# Altium PCB PCB1.PcbDoc
Units mil, origin at the board's own origin, x right, y up, seen from the top; angles counter-clockwise.
Board outline 2435 x 2620 mil, 2 copper layers (Top Layer, Bottom Layer); 6 components, 9 nets, 46 pads, 0 vias.
Unrouted connection lines stored in the file: 2.
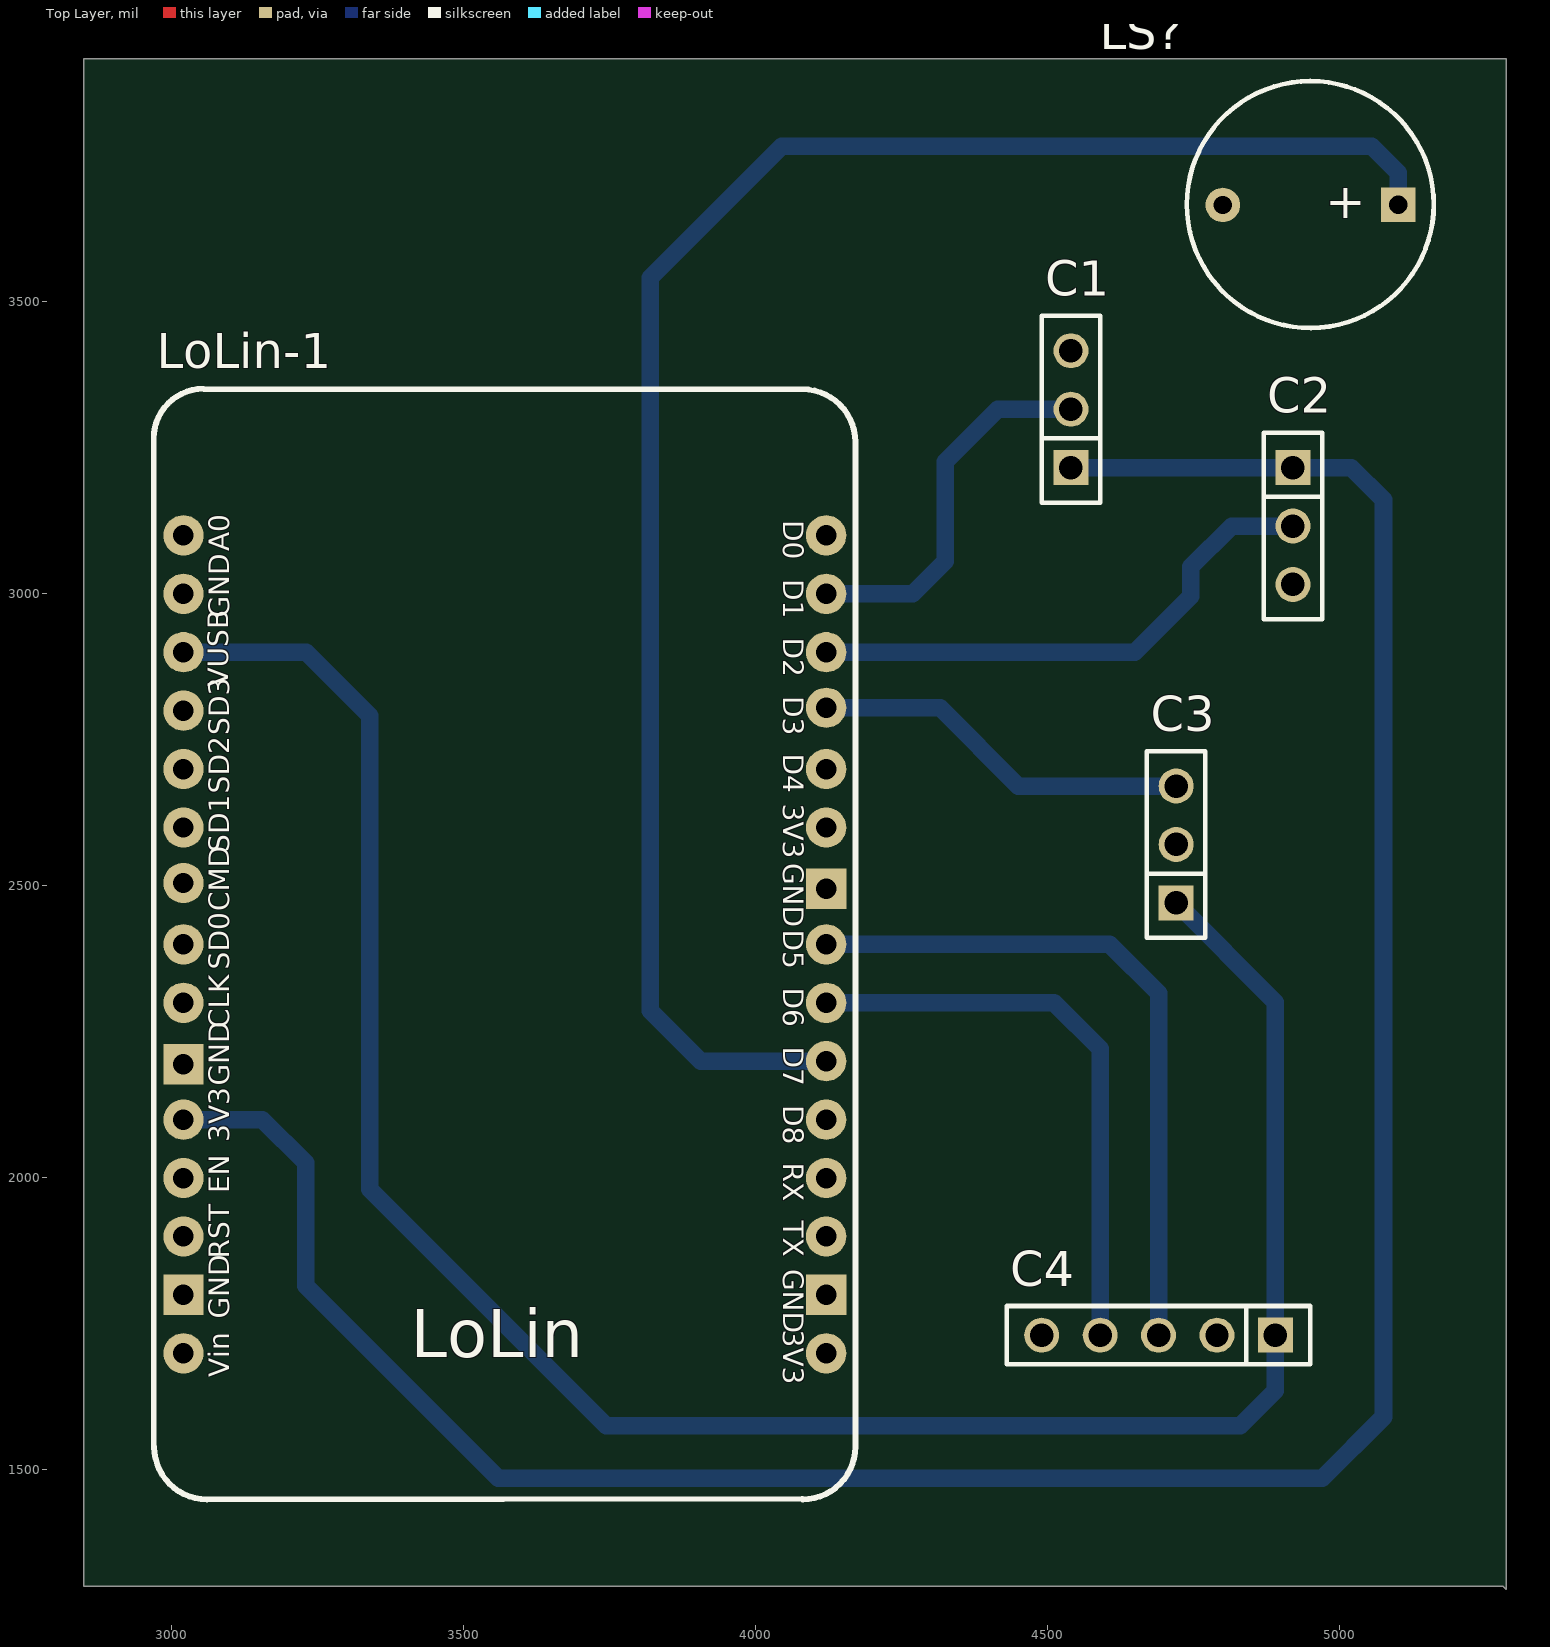
[diagram p0: Top Layer view]
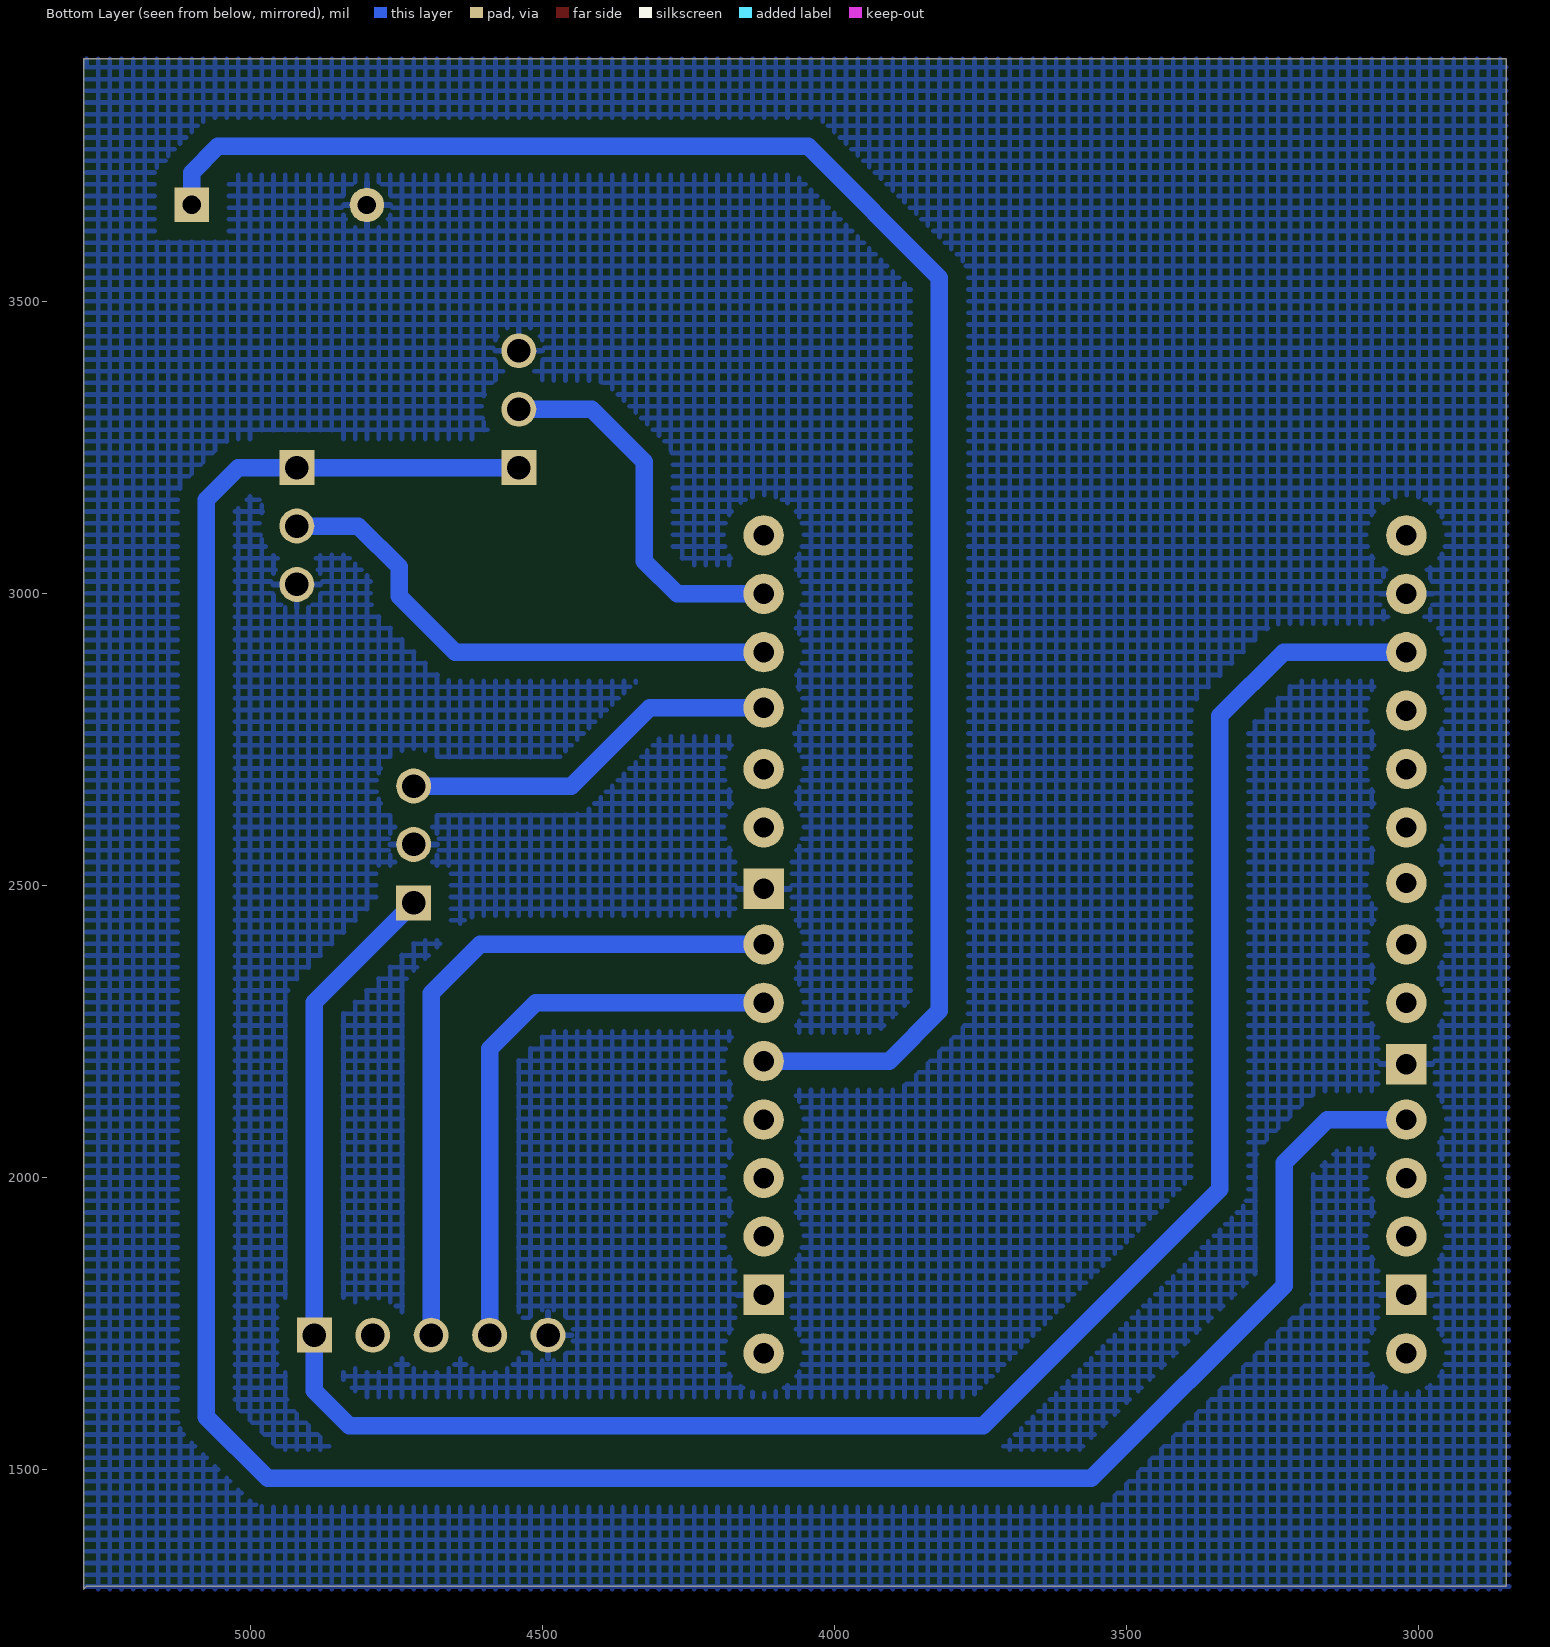
[diagram p1: Bottom Layer view, seen from below]
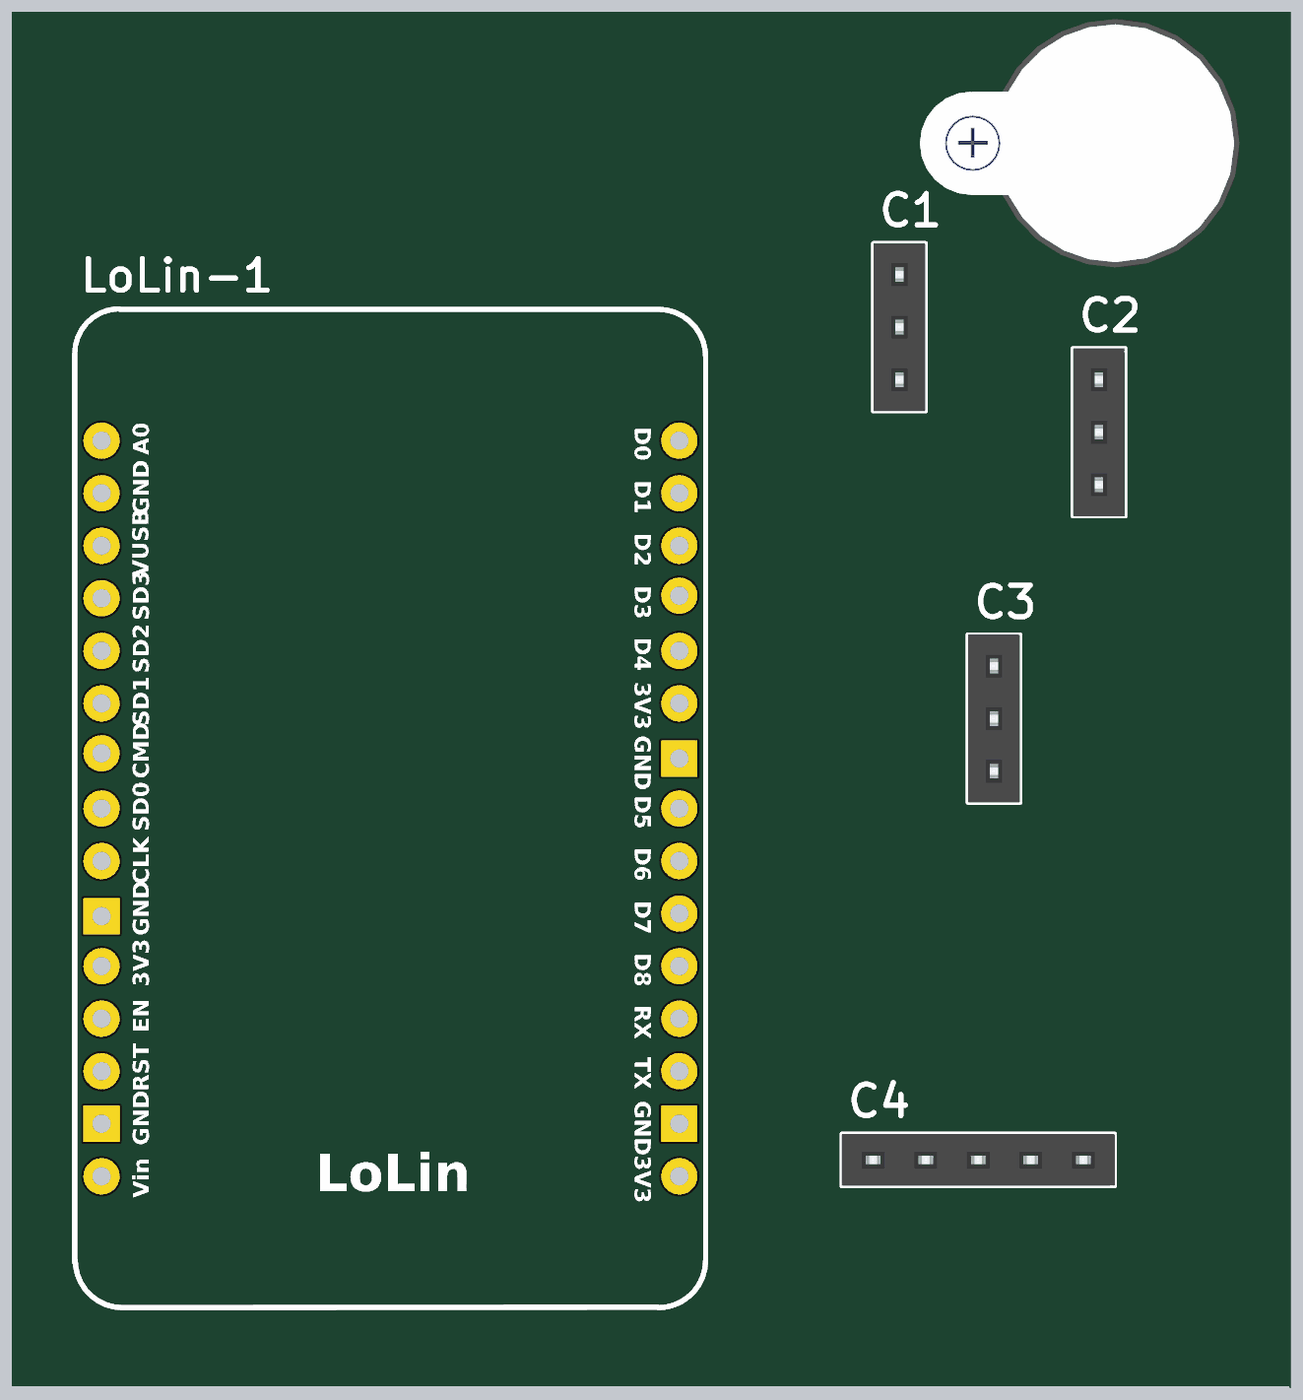
[diagram p2: 3D render of the assembled board from above, using the file's embedded part models]

## Layer stack, top to bottom
Top Solder: solder mask 0.4, Solder Resist, Dk 3.5
Top Layer: signal copper 1.4
Dielectric 1: dielectric 12.6, FR-4, Dk 4.8
Bottom Layer: signal copper 1.4
Bottom Solder: solder mask 0.4, Solder Resist, Dk 3.5

## Board outline
2850,1300 2850,3915 5285,3915 5285,1295 5280,1300

## Design rules (kind name [scope] priority, off if disabled: settings)
Clearance [All] p1: gap=30
PolygonConnect [All] p1: connectstyle=Relief reliefconductorwidth=10 reliefentries=4 polygonreliefangle="90 Angle" airgapwidth=10
RoutingVias [All] p1: holewidth=28 width=50 viastyle="Through Hole" minholewidth=28 minwidth=50 maxholewidth=28 maxwidth=50
SolderMaskExpansion [All] p1: expansion=4
Width [All] p1: maxlimit=30 minlimit=10 preferedwidth=20
30 further rules are at their usual default settings.

## Components (designator, comment, footprint, x,y, rotation, side; value= is the part's Value field where it differs from the comment)
C1 "JP3" JP3-C1T 4540,3215 r90 top
C2 "JP3" JP3-C1T 4920,3215 r270 top
C3 "JP3" JP3-C1T 4720,2470 r90 top
C4 "JP5" JP5-C1T 4890,1730 r180 top
LoLin-1 "NodeMCU V1.0 ESP-12E_1" "LoLin NodeMcu V3" 3070,3345 r0 top
LS? "Speaker" SPEAKER 5100,3665 r180 top

## Footprints (in the part's own frame and the unit in brackets; to place one, negate y for a bottom-side part, rotate by r counter-clockwise, add the part's x,y. Pads: shape width x height; smd on the part's side, far side on the other; paste and mask are expansions set on the pad)
JP3-C1T [mm] "3 row, straight, gold plating"
  rect 1.52x1.52 hole 1.02: 1(0,0)
  round 1.52 hole 1.02: 2(2.54,0) 3(5.08,0)
  silkscreen extent -1.52,-1.27 6.6,1.27, body extent -1.52,-1.25 6.6,1.25, height 8.51
JP5-C1T [mm] "5 row, straight, gold plating"
  rect 1.52x1.52 hole 1.02: 1(0,0)
  round 1.52 hole 1.02: 2(2.54,0) 3(5.08,0) 4(7.62,0) 5(10.16,0)
  silkscreen extent -1.52,-1.27 11.68,1.27, body extent -1.52,-1.25 11.68,1.25, height 8.51
"LoLin NodeMcu V3" [mil]
  round 69 hole 35: 3V3(-49,-1246) 3V3(1051,-1646) 3V3(1051,-746) A0(-49,-246) CLK(-49,-1046) CMD(-49,-841) D0(1051,-246) D1(1051,-346) D2(1051,-446) D3(1051,-541) D4(1051,-646) D5(1051,-946) D6(1051,-1046) D7(1051,-1146) D8(1051,-1246) EN(-49,-1346) GND(-49,-346) RST(-49,-1446) RX(1051,-1346) SD0(-49,-946) SD1(-49,-746) SD2(-49,-646) SD3(-49,-546) TX(1051,-1446) VIN(-49,-1646) VUSB(-49,-446)
  rect 69x69 hole 35: GND(-49,-1546) GND(-49,-1151) GND(1051,-1546) GND(1051,-851)
  silkscreen extent -100,-1896 1101,5
SPEAKER [mm]
  rect 1.5x1.5 hole 0.8: 1(0,0)
  round 1.5 hole 0.8: 2(7.62,0.013)
  silkscreen extent -1.55,-5.38 9.18,5.36, body extent -2.22,-6 13.24,6, height 4.5

## Part data
C1 C2 C3 C4: "WR-PHD 2.54 mm Angled Socket Header"
LoLin-1: "LoLin NodeMCU V3"
LS?: "Loudspeaker"

## Nets (pads, with @x,y where several pads share a name; then routed paths per layer and width w, separated by ;. In a path a pad name is that pad's centre, name@x,y a point inside that pad or via, vN(x,y) a via of type N, cw(c..) or ccw(c..) an arc to the next point about the centre after c; other vN are vias at no path point)
3.3V: C1.1 C2.1 LoLin-1.3V3 | length 4602.6
  Bottom Layer w30: LoLin-1.3V3@3021,2099 3156,2099 3230,2025 3230,1815 3560,1485 4970,1485 5075,1590 5075,3160 5020,3215 C2.1 C1.1
DHT1: C1.2 LoLin-1.D1 | length 649.5
  Bottom Layer w30: LoLin-1.D1 4269,2999 4325,3055 4325,3225 4415,3315 C1.2
DHT2: C2.2 LoLin-1.D2 | length 917.8
  Bottom Layer w30: LoLin-1.D2 4649,2899 4745,2995 4745,3045 4815,3115 C2.2
GND: C1.3 C2.3 C3.2 C4.5 LoLin-1.GND LS?.2
NetC4_3: C4.3 LoLin-1.D5 | length 1188.8
  Bottom Layer w30: LoLin-1.D5 4606,2399 4690,2315 C4.3
NetC4_4: C4.4 LoLin-1.D6 | length 991.7
  Bottom Layer w30: LoLin-1.D6 4511,2299 4590,2220 C4.4
NetLoLin-1_D7: LoLin-1.D7 LS?.1 | length 3038.5
  Bottom Layer w30: LoLin-1.D7 3906,2199 3820,2285 3820,3540 4045,3765 5055,3765 5100,3720 LS?.1
RELAY: C3.3 LoLin-1.D3 | length 654.5
  Bottom Layer w30: LoLin-1.D3 4316,2804 4450,2670 C3.3
VCC: C3.1 C4.1 LoLin-1.VUSB | length 3822.2
  Bottom Layer w30: LoLin-1.VUSB 3231,2899 3340,2790 3340,1980 3745,1575 4830,1575 4890,1635 C4.1 4890,2300 C3.1
pads on no net: C4.2 LoLin-1.A0 LoLin-1.CLK LoLin-1.CMD LoLin-1.D0 LoLin-1.D4 LoLin-1.D8 LoLin-1.EN LoLin-1.RST LoLin-1.RX LoLin-1.SD0 LoLin-1.SD1 LoLin-1.SD2 LoLin-1.SD3 LoLin-1.TX LoLin-1.VIN

## Polygon pours and split planes (outlines as drawn)
GND on Mechanical 1 "Bottom Layer-No Net" (hatched 90Degree grid 20 track 8, remove dead copper): 2850,3580 5280,3580 5280,1300 2850,1300
GND on Mechanical 1 "Bottom Layer-No Net" (hatched 90Degree grid 20 track 8, remove dead copper): 2850,3580 5290,3580 5300,3570 5280,3550 5280,1300 2860,1300
GND on Bottom Layer "Bottom Layer-No Net" (hatched 90Degree grid 20 track 8, remove dead copper, pour order 4): 2850,3915 5290,3915 5280,3905 5280,1295 2845,1295

## Silkscreen, mask and mechanical layers (free items; w line width, h text height)
Mechanical 1:
  lines w10: 2850,1300 2850,1350 2850,3915 5285,3915 5285,1295 5280,1300 2850,1300

## Text inside footprints (layer, text, board x,y; h text height)
LoLin-1: Top Overlay "LoLin" at 3410,1665 h140; Top Overlay "CLK" at 3111,2255 h60 r90; Top Overlay "SD0" at 3111,2355.43 h60 r90; Top Overlay "SD1" at 3111,2556.29 h60 r90; Top Overlay "SD2" at 3111,2656.71 h60 r90; Top Overlay "SD3" at 3111,2757.14 h60 r90; Top Overlay "VUSB" at 3110,2840 h60 r90; Top Overlay "GND" at 3111,2958 h60 r90; Top Overlay "A0" at 3111,3072 h60 r90; Top Overlay "D5" at 4036,2424 h60 r270; Top Overlay "GND" at 4036,2538 h60 r270; Top Overlay "3V3" at 4036,2639.99 h60 r270; Top Overlay "D4" at 4036,2725 h60 r270; Top Overlay "D3" at 4036,2823.42 h60 r270; Top Overlay "D2" at 4036,2923.42 h60 r270; Top Overlay "D1" at 4036,3023.65 h60 r270; Top Overlay "D0" at 4036,3125 h60 r270; Top Overlay "CMD" at 3111,2455.86 h60 r90; Top Overlay "D6" at 4036,2324.88 h60 r270; Top Overlay "3V3" at 4036,1739 h60 r270; Top Overlay "GND" at 4036,1842.8 h60 r270; Top Overlay "TX" at 4036,1926 h60 r270; Top Overlay "RX" at 4036,2024.94 h60 r270; Top Overlay "D8" at 4036,2123.89 h60 r270; Top Overlay "D7" at 4036,2223.77 h60 r270; Top Overlay "Vin" at 3111,1658 h60 r90; Top Overlay "GND" at 3111,1758 h60 r90; Top Overlay "RST" at 3111,1861 h60 r90; Top Overlay "EN" at 3111,1973 h60 r90; Top Overlay "3V3" at 3111,2060 h60 r90; Top Overlay "GND" at 3111,2157 h60 r90
LS?: Top Overlay "+" at 5044.5,3693 h60 r180